# EAGLE board usb-can (EAGLE 9.2.2)
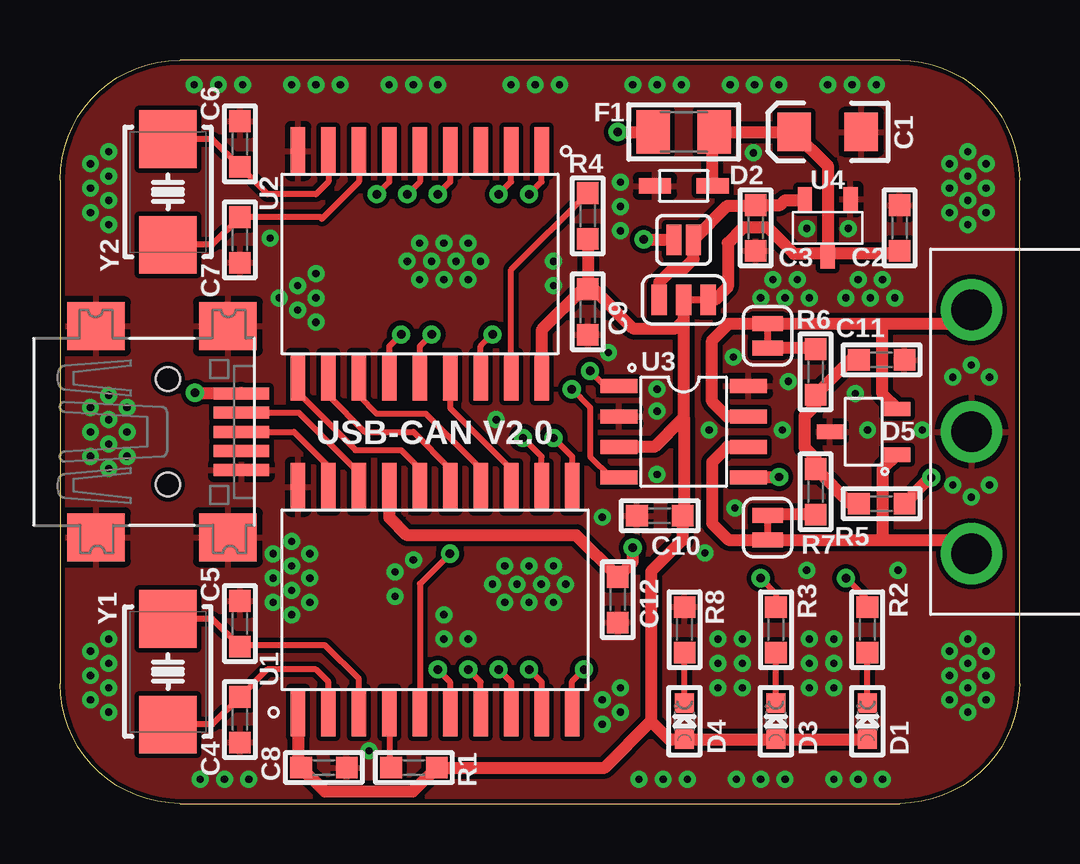
[diagram p0: board, top side]
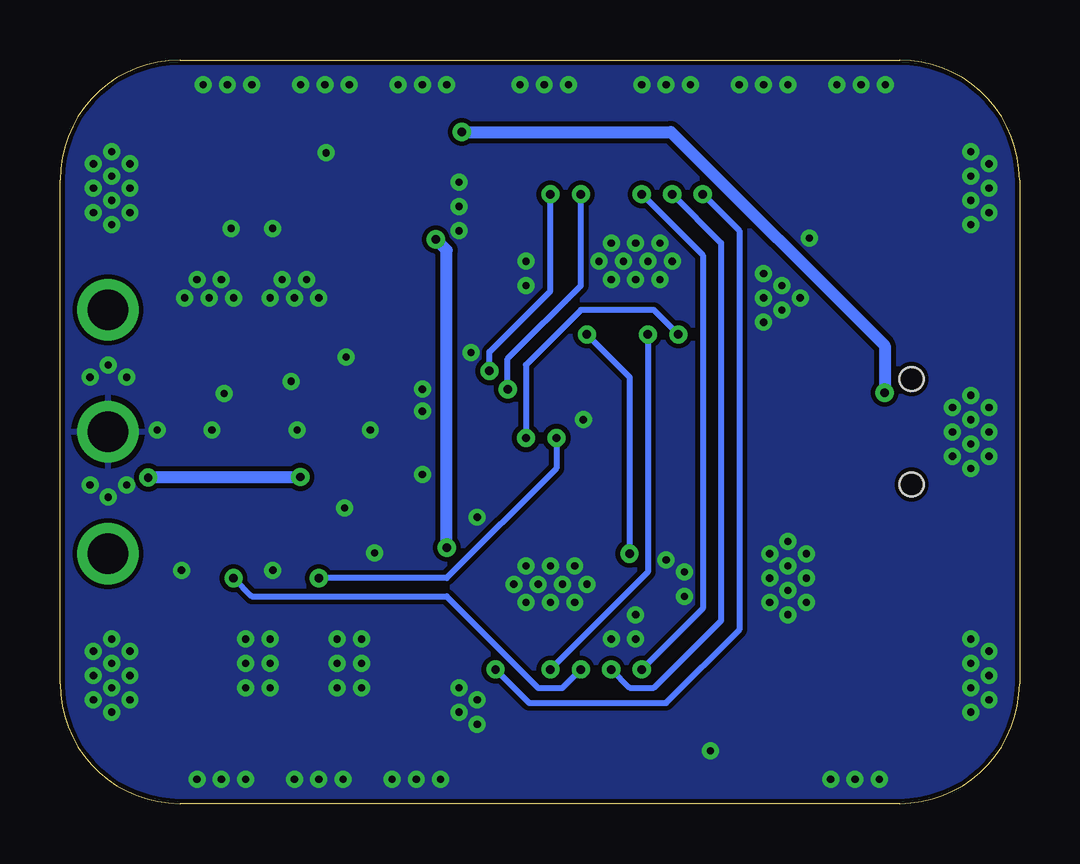
[diagram p1: board, bottom side, seen from below]

Size 40 x 31 mm. Coordinates in mm from the lower left corner, seen from the top.
Outline: 5,0 arc-90 0,5 0,26 arc-90 5,31 35,31 arc-90 40,26 40,5 arc-90 35,0 5,0
Copper layers (1*16): Top 0.035mm / dielectric 1.5mm / Bottom 0.035mm
Design rules "default *": minimum track width 3.5mil, minimum drill 0.3mm, track to track 5mil, track to pad 5mil, pad to pad 5mil, via to via 5mil, smd to smd 5mil, copper to edge 0.2mm, drill to drill 5mil, minimum pad ring 10mil, minimum via ring 8mil, stop-mask expansion 4mil, vias tented up to drill 0.35mm, thermal gap 10mil

## Footprints (pad centres in the part's own frame; a part is rotated, then mirrored left to right if it is on the bottom)
EIA3216 = smd 1.4 x 1.6: + 1.4,0; - -1.4,0
0603_WAVE = smd 0.9 x 0.9: P$1 -0.95,0; P$2 0.95,0
CHIPLED_0603 = smd 0.8 x 0.8: A 0,-0.75; C 0,0.75
SOD323 = smd 1.35 x 0.65: P$1 -1.2,0; P$2 1.2,0
SOT-23-3 = smd 0.6 x 1.1: P$1 -0.95,-1.4; P$2 0.95,-1.4; P$3 0,1.4
_1206 = smd 1.4 x 1.8: 1 -1.27,0; 2 1.27,0
USB-MINIB = smd 0.5 x 2.308: D+ 0,4.064; D- -0.8,4.064; GND 1.6,4.064; ID 0.8,4.064; VBUS -1.6,4.064 | smd 2 x 2.4: GND1 -4.4,-2; GND2 -4.4,3.5; GND3 4.4,3.5; GND4 4.4,-2 | hole 1: -2.2,1; 2.2,1
2EHGR = drill 1.7: P$1 -5.08,0; P$2 0,0; P$3 5.08,0
SMT-JUMPER_3_1-NC_TRACE_SILK = smd 0.635 x 1.27: 1 -1.016,0; 2 0,0; 3 1.016,0
SMT-JUMPER_2_NC_TRACE_SILK = smd 0.635 x 1.27: 1 -0.508,0; 2 0.508,0
SMT-JUMPER_2_NO_SILK = smd 0.635 x 1.27: 1 -0.406,0; 2 0.406,0
SOIC-20_300MIL = smd 0.6 x 2: P$1 -5.08,-4.7; P$2 -3.81,-4.7; P$3 -2.54,-4.7; P$4 -1.27,-4.7; P$5 0,-4.7; P$6 1.27,-4.7; P$7 2.54,-4.7; P$8 3.81,-4.7; P$9 5.08,-4.7; P$10 6.35,-4.7; P$11 6.35,4.7; P$12 5.08,4.7; P$13 3.81,4.7; P$14 2.54,4.7; P$15 1.27,4.7; P$16 0,4.7; P$17 -1.27,4.7; P$18 -2.54,4.7; P$19 -3.81,4.7; P$20 -5.08,4.7
SOIC-18_300MIL = smd 0.6 x 2: P$1 -5.08,-4.7; P$2 -3.81,-4.7; P$3 -2.54,-4.7; P$4 -1.27,-4.7; P$5 0,-4.7; P$6 1.27,-4.7; P$7 2.54,-4.7; P$8 3.81,-4.7; P$9 5.08,-4.7; P$10 5.08,4.7; P$11 3.81,4.7; P$12 2.54,4.7; P$13 1.27,4.7; P$14 0,4.7; P$15 -1.27,4.7; P$16 -2.54,4.7; P$17 -3.81,4.7; P$18 -5.08,4.7
SOIC_8 = smd 0.6 x 1.55: P$1 -1.905,-2.7; P$2 -0.635,-2.7; P$3 0.635,-2.7; P$4 1.905,-2.7; P$5 1.905,2.7; P$6 0.635,2.7; P$7 -0.635,2.7; P$8 -1.905,2.7
SOT-23 = smd 0.6 x 1: 1 -0.95,-1.2; 2 0.95,-1.2; 3 0,1.2
2-SMD-5X3 = smd 2.4 x 2.4: 1 -2.2,0; 2 2.2,0

## Placement (x,y rotation side)
C1  4.7uF  [EIA3216]  32,28 180 top
C2  100nF  [0603_WAVE]  35,24 90 top
C3  1uF  [0603_WAVE]  29,24 270 top
C4  33pF  [0603_WAVE]  7.5,3.5 270 top
C5  33pF  [0603_WAVE]  7.5,7.5 90 top
C6  22pF  [0603_WAVE]  7.5,27.5 90 top
C7  22pF  [0603_WAVE]  7.5,23.5 270 top
C8  100nF  [0603_WAVE]  11,1.5 0 top
C9  100nF  [0603_WAVE]  22,20.5 270 top
C10  100nF  [0603_WAVE]  25,12 0 top
C11  4.7nF  [0603_WAVE]  34.25,18.5 180 top
C12  100nF  [0603_WAVE]  23.25,8.5 270 top
D1  Blue  [CHIPLED_0603]  33.66,3.44 0 top
D2  PESD5V0S1BAF  [SOD323]  26,25.75 180 top
D3  Green  [CHIPLED_0603]  29.84,3.44 0 top
D4  Red  [CHIPLED_0603]  26.04,3.44 0 top
D5  CDSOT23-T24CAN  [SOT-23-3]  33.5,15.5 90 top
F1  250mA  [_1206]  26,28 180 top
J2  USB_MINI_BMINIB  [USB-MINIB]  3.5,15.5 270 top
J3  1X32EHGR  [2EHGR]  38,15.5 90 top
JP1  JUMPER-SMT_3_1-NC_TRACE_SILK  [SMT-JUMPER_3_1-NC_TRACE_SILK]  26,21 0 top
JP2  JUMPER-SMT_2_NC_TRACE_SILK  [SMT-JUMPER_2_NC_TRACE_SILK]  29.5,11.5 270 top
JP3  JUMPER-SMT_2_NC_TRACE_SILK  [SMT-JUMPER_2_NC_TRACE_SILK]  29.5,19.5 90 top
JP4  JUMPER-SMT_2_NO_SILK  [SMT-JUMPER_2_NO_SILK]  26,23.5 0 top
R1  10k  [0603_WAVE]  14.75,1.5 180 top
R2  220  [0603_WAVE]  33.66,7.25 90 top
R3  220  [0603_WAVE]  29.84,7.25 90 top
R4  10k  [0603_WAVE]  22,24.5 90 top
R5  300  [0603_WAVE]  34.25,12.5 180 top
R6  60  [0603_WAVE]  31.5,18 90 top
R7  60  [0603_WAVE]  31.5,13 270 top
R8  220  [0603_WAVE]  26.04,7.25 90 top
U1  MCP2210  [SOIC-20_300MIL]  15,8.5 0 top
U2  MCP2515  [SOIC-18_300MIL]  15,22.5 180 top
U3  MCP2561  [SOIC_8]  26,15.5 270 top
U4  250mA  [SOT-23]  32,24 180 top
Y1  12MHz  [2-SMD-5X3]  4.5,5.5 90 top
Y2  8MHz  [2-SMD-5X3]  4.5,25.5 270 top

## Library data of the parts
C1-C12 = capacitor
D1 D3 D4 = diode led
D2 D5 = diode esd
F1 = fuse
J2 J3 = conector
JP1-JP4 = jumper
R1-R8 = resistor
U1 = converter usb spi
U2 = can controller
U3 = transiever can
U4 = regulator linear
Y1 Y2 = crystal

## Nets
3.3V: C3.P$1 JP1.1 JP4.2 U4.2
5V: C1.+ C2.P$1 D2.P$1 F1.1 JP1.3 U4.3
!CS: U1.P$5 U2.P$16
!INT: U1.P$14 U2.P$12
!RX0BF: U1.P$15 U2.P$11
!RX1BF: U1.P$16 U2.P$10
!TX0RTS: U1.P$6 U2.P$4
!TX1RTS: U1.P$7 U2.P$5
!TX2RTS: U1.P$10 U2.P$6
ACT_LED: R2.P$2 U1.P$8
CANH: D5.P$2 J3.P$3 JP3.2 U3.P$7
CANL: D5.P$1 J3.P$1 JP2.2 U3.P$6
CFG_LED: R3.P$2 U1.P$12
GND: C1.- C2.P$2 C3.P$2 C4.P$2 C5.P$2 C6.P$2 C7.P$2 C8.P$2 C9.P$2 C10.P$1 C11.P$1 C12.P$2 D2.P$2 D5.P$3 J2.GND J2.GND1 J2.GND2 J2.GND3 J2.GND4 J3.P$2 R8.P$2 U1.P$20 U2.P$9 U3.P$2 U3.P$8 U4.1
MISO: U1.P$13 U2.P$15
MOSI: U1.P$9 U2.P$14
N$1: JP2.1 R7.P$2
N$2: D1.C R2.P$1
N$3: D3.C R3.P$1
N$4: R1.P$2 U1.P$4
N$5: R4.P$2 U2.P$17
N$6: D4.C R8.P$1
N$7: JP3.1 R6.P$2
N$8: F1.2 J2.VBUS
N$9: C12.P$1 JP4.1 U1.P$17
N$10: C11.P$2 R5.P$2 R6.P$1 R7.P$1
N$12: R5.P$1 U3.P$5
RXCAN: U2.P$2 U3.P$4
SCK: U1.P$11 U2.P$13
TXCAN: U2.P$1 U3.P$1
U1_OSC1: C4.P$1 U1.P$2 Y1.1
U1_OSC2: C5.P$1 U1.P$3 Y1.2
U2_OSC1: C7.P$1 U2.P$7 Y2.2
U2_OSC2: C6.P$1 U2.P$8 Y2.1
USB_D+: J2.D+ U1.P$19
USB_D-: J2.D- U1.P$18
VCCIO: C8.P$1 C9.P$1 C10.P$2 D1.A D3.A D4.A JP1.2 R1.P$1 R4.P$1 U1.P$1 U2.P$18 U3.P$3

## Tracks (layer width: path | path; a pad name or v marks a point on that pad's centre or on a via)
3.3V
  Top 0.508: JP1.1 24.98,21.73 25.45,22.2 25.91,22.2 26.41,22.7 JP4.2 27.83,24.92 28.97,24.92 C3.P$1 30.03,24.95 30.23,25.15 31,25.15 U4.2
5V
  Top 0.254: C2.P$1 34.88,22.93 | 32.12,22.93 U4.3 31.88,22.93
  Top 0.508: 34.88,22.93 32.12,22.93 | U4.3 32,26.6 C1.+ 27.18,28 | 31.88,22.93 31.05,22.93 30.59,22.93 29.52,24 28.47,24 27.84,23.37 27.84,21.54 27.3,21 JP1.3 | D2.P$1 27.2,27.98 27.18,28 | F1.1 27.18,28
!CS  (via drill 0.35)
  Top 0.254: U2.P$16 17.54,19.06 v18.03,19.56 | v16.26,10.41 15,9.16 U1.P$5
  Bottom 0.254: v18.03,19.56 16.26,17.78 v16.26,10.41
!INT
  Top 0.254: U2.P$12 12.46,17 13.21,16.26 15.24,16.26 17.54,13.96 U1.P$14
!RX0BF
  Top 0.254: U2.P$11 11.19,17 12.7,15.49 14.73,15.49 16.27,13.96 U1.P$15
!RX1BF
  Top 0.254: U2.P$10 9.92,17.13 12.32,14.73 14.22,14.73 15,13.96 U1.P$16
!TX0RTS  (via drill 0.35)
  Top 0.254: U2.P$4 16.27,25.92 v15.75,25.4 | v15.75,5.59 16.26,5.08 16.26,3.81 U1.P$6
  Bottom 0.254: v15.75,25.4 13.21,22.86 13.21,8.13 v15.75,5.59
!TX1RTS  (via drill 0.35)
  Top 0.254: U2.P$5 15,25.92 v14.48,25.4 | U1.P$7 17.54,5.07 v17.02,5.59
  Bottom 0.254: v14.48,25.4 12.45,23.37 12.45,7.62 15.24,4.83 16.26,4.83 v17.02,5.59
!TX2RTS  (via drill 0.35)
  Top 0.254: U1.P$10 21.35,5.09 v21.84,5.59 | v13.21,25.4 13.73,25.92 U2.P$6
  Bottom 0.254: v21.84,5.59 20.45,4.19 14.74,4.19 11.68,7.24 11.68,23.88 v13.21,25.4
ACT_LED  (via drill 0.35)
  Top 0.254: R2.P$2 33.66,8.51 v32.77,9.4 | v18.29,5.59 18.81,5.07 U1.P$8
  Bottom 0.254: v32.77,9.4 32,8.64 23.88,8.64 20.07,4.82 19.05,4.82 v18.29,5.59
CANH
  Top 0.508: U3.P$7 27.81,16.14 27.18,16.76 27.18,19.3 27.88,20.01 JP3.2 34.29,20.01 | 34.29,20.01 37.43,20.01 J3.P$3 | D5.P$2 34.29,17.06 34.29,20.01
CANL
  Top 0.508: U3.P$6 27.82,14.87 27.18,14.22 27.18,11.68 27.87,10.99 JP2.2 34.29,10.99 | 34.29,10.99 37.43,10.99 J3.P$1 | D5.P$1 34.29,13.94 34.29,10.99
CFG_LED  (via drill 0.35)
  Top 0.254: U1.P$12 20.08,14.46 v19.3,15.24 | v29.21,9.4 29.84,8.76 R3.P$2
  Bottom 0.254: v19.3,15.24 19.3,13.97 23.88,9.4 v29.21,9.4
GND  (via drill 0.3)
  other vias: 24.89,13.72 22.61,11.94 1.27,26.67 2.03,27.18 2.03,26.16 1.27,25.65 2.03,25.15 1.27,24.64 2.03,24.13 9.14,21.08 9.91,20.57 10.67,20.07 10.67,21.08 10.67,22.1 9.91,21.59 2.03,16 2.79,16.51 2.79,15.49 2.79,14.48 2.03,13.97 1.27,14.48 2.03,14.99 1.27,15.49 1.27,16.51 2.03,17.02 2.03,3.81 1.27,4.32 2.03,4.83 1.27,5.33 2.03,5.84 1.27,6.35 2.03,6.86 5.84,1.02 6.86,1.02 7.87,1.02 13.97,8.64 13.97,9.65 14.73,10.16 22.61,4.32 22.61,3.3 23.37,3.81 23.37,4.83 24.13,1.02 25.15,1.02 26.16,1.02 28.19,1.02 29.21,1.02 30.23,1.02 32.26,1.02 33.27,1.02 34.29,1.02 32.26,4.83 31.24,4.83 31.24,5.84 32.26,5.84 31.24,6.86 32.26,6.86 28.45,5.84 28.45,4.83 27.43,4.83 27.43,5.84 27.43,6.86 28.45,6.86 18.54,8.38 19.56,8.38 20.57,8.38 21.08,9.14 20.07,9.14 19.05,9.14 18.03,9.14 18.54,9.91 19.56,9.91 20.57,9.91 24.89,17.27 24.89,16.36 20.57,21.59 20.57,22.61 14.99,23.37 16,23.37 17.02,23.37 17.53,22.61 16.51,22.61 17.02,21.84 16,21.84 14.99,21.84 15.49,22.61 14.48,22.61 5.59,29.97 34.04,29.97 23.37,23.88 23.37,24.89 23.37,25.91 8.89,10.41 9.65,10.92 10.41,10.41 9.65,9.91 8.89,9.4 9.65,8.89 10.41,9.4 10.41,8.38 9.65,7.87 8.89,8.38 6.6,29.97 7.62,29.97 9.65,29.97 10.67,29.97 11.68,29.97 13.72,29.97 14.73,29.97 15.75,29.97 18.8,29.97 19.81,29.97 23.88,29.97 24.89,29.97 25.91,29.97 27.94,29.97 28.96,29.97 29.97,29.97 32,29.97 33.02,29.97 29.21,21.08 29.72,21.84 30.23,21.08 30.73,21.84 31.24,21.08 32.77,21.08 33.27,21.84 34.29,21.84 33.78,21.08 34.8,21.08 37.08,26.67 37.85,27.18 38.61,26.67 37.85,26.16 37.08,25.65 37.85,25.15 38.61,25.65 38.61,24.64 37.85,24.13 37.08,24.64 37.08,6.35 37.85,6.86 38.61,6.35 37.85,5.84 37.08,5.33 38.61,5.33 37.85,4.83 37.08,4.32 37.85,3.81 38.61,4.32 37.22,13.28 38.75,13.28 37.98,12.77 37.22,17.77 37.98,18.28 38.75,17.77 12.88,2.2 16,6.86 16,7.87 17.02,6.86 26.88,10.45 31.13,9.73 34.94,9.73 28.13,12.32 30.11,15.57 30.36,17.6 28.08,18.62 27.06,15.57 33.67,15.57 33.16,17.09 35.95,15.57 8.76,23.57 20.83,29.97 18.19,16 28.91,27.13 31.14,23.98 32.87,23.98 22.86,18.8
  pour Top (isolate 0.2): 5,0 arc-90 0,5 0,26 arc-90 5,31 35,31 arc-90 40,26 40,5 arc-90 35,0
  pour Bottom (isolate 0.2): 5,0 arc-90 0,5 0,26 arc-90 5,31 35,31 arc-90 40,26 40,5 arc-90 35,0
MISO
  Top 0.254: U2.P$15 16.27,16.5 18.81,13.96 U1.P$13
MOSI  (via drill 0.35)
  Top 0.254: U2.P$14 15,19.06 v15.49,19.56 | v19.56,5.59 20.08,5.07 U1.P$9
  Bottom 0.254: v15.49,19.56 15.49,9.65 v19.56,5.59
N$1
  Top 0.254: 29.54,12.05 JP2.1
  Top 0.508: R7.P$2 29.54,12.05
N$2
  Top 0.254: D1.C R2.P$1
N$3
  Top 0.254: D3.C R3.P$1
N$4
  Top 0.254: U1.P$4 13.73,1.57 R1.P$2
N$5
  Top 0.254: U2.P$17 18.81,22.26 R4.P$2
N$6
  Top 0.254: D4.C R8.P$1
N$7
  Top 0.254: R6.P$2 31.46,18.99
  Top 0.508: 31.46,18.99 JP3.1
N$8  (via drill 0.35)
  Top 0.254: 7.54,17.12 J2.VBUS
  Top 0.508: v5.62,17.12 7.54,17.12 | v23.25,28 F1.2
  Bottom 0.508: v23.25,28 14.54,28 5.62,19.09 v5.62,17.12
N$9  (via drill 0.35)
  Top 0.508: U1.P$17 13.73,11.92 14.47,11.18 21.52,11.18 C12.P$1 23.88,10.08 v23.88,10.67 | v24.33,23.52 25.57,23.52 JP4.1
  Bottom 0.508: v23.88,10.67 23.88,23.06 v24.33,23.52
N$10
  Top 0.254: 32.95,18.5 C11.P$2 | 32.95,12.5 R5.P$2 | R7.P$1 31.5,14.38 | 31.5,16.62 R6.P$1
  Top 0.508: R6.P$1 32.95,18.5 | R7.P$1 32.95,12.5 | 31.5,14.38 31.04,14.84 31.04,16.16 31.5,16.62
N$12  (via drill 0.35)
  Top 0.254: 36.29,13.59 v36.32,13.59 | v29.98,13.62 29.95,13.6
  Top 0.508: R5.P$1 36.29,13.59 | 29.95,13.6 U3.P$5
  Bottom 0.254: v36.32,13.59 36.3,13.62
  Bottom 0.508: 36.3,13.62 v29.98,13.62
RXCAN  (via drill 0.35)
  Top 0.254: U3.P$4 22.98,13.6 22.1,14.48 22.1,16.51 v21.34,17.27 | v18.29,25.4 18.81,25.92 U2.P$2
  Bottom 0.254: v21.34,17.27 21.34,18.54 18.29,21.59 v18.29,25.4
SCK  (via drill 0.35)
  Top 0.254: U2.P$13 13.73,19.06 v14.22,19.56 | v20.57,15.24 21.35,14.46 U1.P$11
  Bottom 0.254: v14.22,19.56 15.24,20.57 18.29,20.57 20.57,18.29 v20.57,15.24
TXCAN  (via drill 0.35)
  Top 0.254: U3.P$1 22.73,17.41 v22.1,18.03 | v19.56,25.4 20.08,25.92 U2.P$1
  Bottom 0.254: v22.1,18.03 22.1,18.83 19.56,21.37 v19.56,25.4
U1_OSC1
  Top 0.254: U1.P$2 11.19,5.07 10.67,5.59 8.64,5.59 C4.P$1 6.35,3.3 Y1.1
U1_OSC2
  Top 0.254: U1.P$3 12.46,5.07 12.46,5.19 11.05,6.6 10.92,6.6 7.55,6.6 C5.P$1 6.35,7.7 Y1.2
U2_OSC1
  Top 0.254: U2.P$7 12.46,25.92 10.92,24.38 10.86,24.45 C7.P$1 6.35,23.3 Y2.2
U2_OSC2
  Top 0.254: U2.P$8 11.19,25.92 10.67,25.4 8.65,25.4 C6.P$1 6.35,27.7 Y2.1
USB_D+
  Top 0.254: J2.D+ 9.75,15.5 11.19,14.06 U1.P$19
USB_D-
  Top 0.254: J2.D- 9.95,16.3 12.46,13.79 U1.P$18
VCCIO
  Top 0.254: 9.92,1.63 C8.P$1 | 26,12.05 C10.P$2 | 25.91,16 26,16.09
  Top 0.508: R4.P$1 C9.P$1 | C9.P$1 21.8,21.45 20.08,19.73 20.08,19.53 U2.P$18 | U1.P$1 9.92,1.63 | C8.P$1 11.04,0.51 14.71,0.51 R1.P$1 22.71,1.5 24.64,3.43 | C10.P$2 25.95,10.98 24.64,9.67 24.64,3.43 | 24.64,3.43 25.38,2.69 D4.A D3.A D1.A | U3.P$3 24.77,14.87 25.91,16 | 26,12.05 26,16.09 26,20.16 | 26,20.16 25.65,19.81 23.89,19.81 22.25,21.45 C9.P$1 | 26,20.16 JP1.2

## Text on the board
tNames: USB-CAN V2.0